# EAGLE board ACE3 (EAGLE 9.4.1)

Size 140.95 x 117.78 mm. Coordinates in mm from the lower left corner, seen from the top.
Outline: 0,0 140.95,0 140.95,117.78 0,117.78 0,0
Copper layers (1*16): Top 0.035mm / dielectric 1.5mm / Bottom 0.035mm
Design rules "default": minimum track width 6mil, minimum drill 0.35mm, track to track 6mil, track to pad 6mil, pad to pad 6mil, via to via 6mil, smd to smd 6mil, copper to edge 40mil, drill to drill 6mil, minimum pad ring 10mil, minimum via ring 8mil, stop-mask expansion 4mil, vias tented up to drill 0mil, thermal gap 10mil

## Footprints (pad centres in the part's own frame; a part is rotated, then mirrored left to right if it is on the bottom)
L02P = drill 1.016 long: 1 1.25,-6.25; 2 -1.25,-6.25
C025-024X044 = drill 0.813 octagon: 1 -1.27,0; 2 1.27,0
E5-5 = drill 0.813 pad 1.905: + -2.54,0 | drill 0.813 pad 1.905 octagon: - 2.54,0
D-2.5 = drill 0.813 octagon: A 1.27,0; C -1.27,0
EDG-CON-JA = smd 1.9 x 8: 0V.1 -25.4,0; +5V -20.32,0; +9V -22.86,0; A0 17.78,0; A2 5.08,0; A7 15.24,0; A8 12.7,0; A9 10.16,0; A10 7.62,0; A11 -15.24,0; A12 -12.7,0; A13 -10.16,0; A14 -7.62,0; A15 -5.08,0; CLK -17.78,0; D1 20.32,0; D3 0,0; D4 -2.54,0; D5 2.54,0; D6 22.86,0; N.C.1 33.02,0; N.C.2 30.48,0; V0.2 -27.94,0; WE 25.4,0 | smd 1.9 x 8 bottom: A1 17.78,0; A3 15.24,0; A4 12.7,0; A5 10.16,0; A6 7.62,0; BUSACK -7.62,0; BUSREQ -2.54,0; D0 20.32,0; D2 22.86,0; D7 25.4,0; GND -27.94,0; HALT -20.32,0; INT -25.4,0; IOREQ -15.24,0; M1 2.54,0; MREQ -17.78,0; N.C.3 33.02,0; N.C.4 30.48,0; NMI -22.86,0; RD -12.7,0; RESET 0,0; RFSH 5.08,0; WAIT -5.08,0; WR -10.16,0
EDG-VID-JA = smd 1.9 x 8: 0V.1 16.51,1.27; 0V.2 11.43,1.27; H0/A0 -13.97,1.27; H1/A1 6.35,1.27; H4/A4 -11.43,1.27; N.C. 8.89,1.27; V2/A7 3.81,1.27; VD0 -3.81,1.27; VD3 -8.89,1.27; VD4 -6.35,1.27; VD5 1.27,1.27; VD7 -1.27,1.27 | smd 1.9 x 8 bottom: +5V 11.43,1.27; H2/A2 -1.27,1.27; H3/A3 -13.97,1.27; V0/A5 -11.43,1.27; V1/A6 -3.81,1.27; V3/A8 3.81,1.27; V4/A9 6.35,1.27; VD1 -6.35,1.27; VD2 -8.89,1.27; VD6 8.89,1.27; VIDEO 16.51,1.27; WE 1.27,1.27
TO220H = drill 1.118 long: 1 -2.54,-10.16; 2 0,-10.16; 3 2.54,-10.16 | hole 3.302: 0,4.826
DIL14 = drill 0.813 long: 1 -7.62,-3.81; 2 -5.08,-3.81; 3 -2.54,-3.81; 4 0,-3.81; 5 2.54,-3.81; 6 5.08,-3.81; 7 7.62,-3.81; 8 7.62,3.81; 9 5.08,3.81; 10 2.54,3.81; 11 0,3.81; 12 -2.54,3.81; 13 -5.08,3.81; 14 -7.62,3.81
Z15/4 = drill 0.6 octagon: 1 -6,-1.8; 2 6,1.8
TO92 = drill 0.813 octagon: 1 1.27,0; 2 0,1.905; 3 -1.27,0
0207/2V = drill 0.813 octagon: 1 -1.27,0; 2 1.27,0
0204/7 = drill 0.813 octagon: 1 -3.81,0; 2 3.81,0
DIL16 = drill 0.813 long: 1 -8.89,-3.81; 2 -6.35,-3.81; 3 -3.81,-3.81; 4 -1.27,-3.81; 5 1.27,-3.81; 6 3.81,-3.81; 7 6.35,-3.81; 8 8.89,-3.81; 9 8.89,3.81; 10 6.35,3.81; 11 3.81,3.81; 12 1.27,3.81; 13 -1.27,3.81; 14 -3.81,3.81; 15 -6.35,3.81; 16 -8.89,3.81
B3F-31XX = drill 1.016 octagon: 1 -2.261,-1.245; 2 2.261,-1.245 | drill 1.499 pad 2.159: 3 -3.505,1.245; 4 3.505,1.245
AL30P = drill 1.194 pad 2.54 octagon: 1 -7.493,0; 2 7.493,0
TO18 = drill 0.813 octagon: 1 -1.27,-1.27; 2 1.27,-1.27; 3 1.27,1.27
HC49U-V = drill 0.813: 1 -2.413,0; 2 2.413,0
DIL40 = drill 0.813 long: 1 -24.13,-7.62; 2 -21.59,-7.62; 3 -19.05,-7.62; 4 -16.51,-7.62; 5 -13.97,-7.62; 6 -11.43,-7.62; 7 -8.89,-7.62; 8 -6.35,-7.62; 9 -3.81,-7.62; 10 -1.27,-7.62; 11 1.27,-7.62; 12 3.81,-7.62; 13 6.35,-7.62; 14 8.89,-7.62; 15 11.43,-7.62; 16 13.97,-7.62; 17 16.51,-7.62; 18 19.05,-7.62; 19 21.59,-7.62; 20 24.13,-7.62; 21 24.13,7.62; 22 21.59,7.62; 23 19.05,7.62; 24 16.51,7.62; 25 13.97,7.62; 26 11.43,7.62; 27 8.89,7.62; 28 6.35,7.62; 29 3.81,7.62; 30 1.27,7.62; 31 -1.27,7.62; 32 -3.81,7.62; 33 -6.35,7.62; 34 -8.89,7.62; 35 -11.43,7.62; 36 -13.97,7.62; 37 -16.51,7.62; 38 -19.05,7.62; 39 -21.59,7.62; 40 -24.13,7.62
DIL28 = drill 0.813 long: 1 -16.51,-7.62; 2 -13.97,-7.62; 3 -11.43,-7.62; 4 -8.89,-7.62; 5 -6.35,-7.62; 6 -3.81,-7.62; 7 -1.27,-7.62; 8 1.27,-7.62; 9 3.81,-7.62; 10 6.35,-7.62; 11 8.89,-7.62; 12 11.43,-7.62; 13 13.97,-7.62; 14 16.51,-7.62; 15 16.51,7.62; 16 13.97,7.62; 17 11.43,7.62; 18 8.89,7.62; 19 6.35,7.62; 20 3.81,7.62; 21 1.27,7.62; 22 -1.27,7.62; 23 -3.81,7.62; 24 -6.35,7.62; 25 -8.89,7.62; 26 -11.43,7.62; 27 -13.97,7.62; 28 -16.51,7.62
DIP254P1524X393-32 = drill 1.118 pad 1.676 square: 1 -15.24,38.1 | drill 1.118 pad 1.676: 2 -15.24,35.56; 3 -15.24,33.02; 4 -15.24,30.48; 5 -15.24,27.94; 6 -15.24,25.4; 7 -15.24,22.86; 8 -15.24,20.32; 9 -15.24,17.78; 10 -15.24,15.24; 11 -15.24,12.7; 12 -15.24,10.16; 13 -15.24,7.62; 14 -15.24,5.08; 15 -15.24,2.54; 16 -15.24,0; 17 0,0; 18 0,2.54; 19 0,5.08; 20 0,7.62; 21 0,10.16; 22 0,12.7; 23 0,15.24; 24 0,17.78; 25 0,20.32; 26 0,22.86; 27 0,25.4; 28 0,27.94; 29 0,30.48; 30 0,33.02; 31 0,35.56; 32 0,38.1
DIL24-6 = drill 0.813 long: 1 -13.97,-7.62; 2 -11.43,-7.62; 3 -8.89,-7.62; 4 -6.35,-7.62; 5 -3.81,-7.62; 6 -1.27,-7.62; 7 1.27,-7.62; 8 3.81,-7.62; 9 6.35,-7.62; 10 8.89,-7.62; 11 11.43,-7.62; 12 13.97,-7.62; 13 13.97,7.62; 14 11.43,7.62; 15 8.89,7.62; 16 6.35,7.62; 17 3.81,7.62; 18 1.27,7.62; 19 -1.27,7.62; 20 -3.81,7.62; 21 -6.35,7.62; 22 -8.89,7.62; 23 -11.43,7.62; 24 -13.97,7.62

## Placement (x,y rotation side)
AUDIO-IN  [L02P]  135.89,73.66 0 top
AUDIO-OUT  [L02P]  123.19,120.65 0 top
C1  47N  [C025-024X044]  34.29,80.01 0 top
C2  47N  [C025-024X044]  -64.77,152.4 0 top  (outside the outline)
C3  47N  [C025-024X044]  -69.85,152.4 0 top  (outside the outline)
C4  42p  [C025-024X044]  -74.93,152.4 0 top  (outside the outline)
C5  47N  [C025-024X044]  -80.01,152.4 0 top  (outside the outline)
C6  47N  [C025-024X044]  -85.09,152.4 0 top  (outside the outline)
C7  1U  [E5-5]  64.77,93.98 0 top
C8  2N2  [C025-024X044]  -90.17,152.4 0 top  (outside the outline)
C9  100u  [E5-5]  -135.89,158.75 0 top  (outside the outline)
C10  100N  [C025-024X044]  -140.97,140.97 0 top  (outside the outline)
C11  100u  [E5-5]  -147.32,158.75 0 top  (outside the outline)
C12  100u  [E5-5]  73.66,93.98 0 top
C13  100N  [C025-024X044]  -147.32,140.97 0 top  (outside the outline)
C14  100N  [C025-024X044]  -153.67,140.97 0 top  (outside the outline)
C15  100N  [C025-024X044]  77.47,80.01 0 top
C16  100N  [C025-024X044]  71.12,80.01 0 top
C17  100N  [C025-024X044]  64.77,80.01 0 top
C18  100N  [C025-024X044]  58.42,80.01 0 top
C19  100N  [C025-024X044]  52.07,80.01 0 top
C20  100N  [C025-024X044]  45.72,80.01 0 top
C21  100N  [C025-024X044]  39.37,80.01 0 top
COMPOSITE-OUT  [L02P]  135.89,120.65 0 top
D1  1N4148DO35  [D-2.5]  -156.21,-67.31 0 top  (outside the outline)
D2  1N4148DO35  [D-2.5]  -156.21,-73.66 0 top  (outside the outline)
D3  1N4148DO35  [D-2.5]  -156.21,-86.36 0 top  (outside the outline)
D4  1N4148DO35  [D-2.5]  -156.21,-92.71 0 top  (outside the outline)
D5  1N4148DO35  [D-2.5]  -156.21,-99.06 0 top  (outside the outline)
D6  1N4148DO35  [D-2.5]  -156.21,-105.41 0 top  (outside the outline)
D7  1N4148DO35  [D-2.5]  -156.21,-111.76 0 top  (outside the outline)
D8  1N4148DO35  [D-2.5]  -156.21,-118.11 0 top  (outside the outline)
D9  1N4148DO35  [D-2.5]  -156.21,-124.46 0 top  (outside the outline)
D10  1N4148DO35  [D-2.5]  -156.21,-130.81 0 top  (outside the outline)
D11  1N4148DO35  [D-2.5]  -156.21,-60.96 0 top  (outside the outline)
E1  EDG-CON-JA  [EDG-CON-JA]  45.72,71.12 0 top
E2  EDG-VID-JA  [EDG-VID-JA]  -96.52,140.97 0 top  (outside the outline)
IC1  7805T  [TO220H]  -68.58,12.7 0 top  (outside the outline)
IC2  74HCT04N  [DIL14]  67.31,10.16 0 top
IC4  74LS32N  [DIL14]  15.24,6.35 0 top
L1  [Z15/4]  53.34,93.98 0 top
POWER-IN-9V-DC  [L02P]  -3.81,6.35 90 top
Q1  2N3904  [TO92]  -67.31,172.72 0 top  (outside the outline)
Q3  BC237  [TO92]  -92.71,172.72 0 top  (outside the outline)
R1  47k  [0207/2V]  64.77,100.33 0 top
R2  12k  [0207/2V]  58.42,100.33 0 top
R3  1K5  [0207/2V]  -154.94,166.37 0 top  (outside the outline)
R4  1K5  [0207/2V]  77.47,100.33 0 top
R5  12k  [0207/2V]  52.07,100.33 0 top
R6  1K  [0207/2V]  39.37,100.33 0 top
R7  1k0  [0204/7]  -100.33,171.45 0 top  (outside the outline)
R8  270R  [0207/2V]  41.91,93.98 0 top
R9  47k  [0207/2V]  45.72,100.33 0 top
R10  10k  [0207/2V]  -66.04,166.37 0 top  (outside the outline)
R11  1k  [0207/2V]  71.12,100.33 0 top
R12  1k  [0207/2V]  -72.39,166.37 0 top  (outside the outline)
R13  1k  [0207/2V]  -78.74,166.37 0 top  (outside the outline)
R14  1k  [0207/2V]  -85.09,166.37 0 top  (outside the outline)
R15  1k  [0207/2V]  -91.44,166.37 0 top  (outside the outline)
R16  1k  [0207/2V]  -97.79,166.37 0 top  (outside the outline)
R17  1k  [0207/2V]  -104.14,166.37 0 top  (outside the outline)
R18  1k  [0207/2V]  -110.49,166.37 0 top  (outside the outline)
R19  1k  [0207/2V]  -116.84,166.37 0 top  (outside the outline)
R20  1k  [0207/2V]  -123.19,166.37 0 top  (outside the outline)
R21  1k  [0207/2V]  -129.54,166.37 0 top  (outside the outline)
R22  1k  [0207/2V]  -135.89,166.37 0 top  (outside the outline)
R23  1k  [0207/2V]  -142.24,166.37 0 top  (outside the outline)
R24  10k  [0207/2V]  -148.59,166.37 0 top  (outside the outline)
R25  220k  [0207/2V]  34.29,93.98 0 top
R26  330R  [0204/7]  -110.49,171.45 0 top  (outside the outline)
RN1  1K0  [DIL16]  109.22,22.86 0 top
RN2  1K0  [DIL16]  107.95,8.89 0 top
S1  1  [B3F-31XX]  -128.27,57.15 0 top  (outside the outline)
S2  2  [B3F-31XX]  -138.43,57.15 0 top  (outside the outline)
S3  3  [B3F-31XX]  -148.59,57.15 0 top  (outside the outline)
S4  4  [B3F-31XX]  -17.78,76.2 0 top  (outside the outline)
S5  5  [B3F-31XX]  -27.94,76.2 0 top  (outside the outline)
S6  6  [B3F-31XX]  -38.1,76.2 0 top  (outside the outline)
S7  7  [B3F-31XX]  -48.26,76.2 0 top  (outside the outline)
S8  8  [B3F-31XX]  -58.42,76.2 0 top  (outside the outline)
S9  9  [B3F-31XX]  -68.58,76.2 0 top  (outside the outline)
S10  0  [B3F-31XX]  -78.74,76.2 0 top  (outside the outline)
S11  Q  [B3F-31XX]  -88.9,76.2 0 top  (outside the outline)
S12  W  [B3F-31XX]  -99.06,76.2 0 top  (outside the outline)
S13  E  [B3F-31XX]  134.62,88.9 0 top
S14  R  [B3F-31XX]  124.46,88.9 0 top
S15  T  [B3F-31XX]  114.3,88.9 0 top
S16  Y  [B3F-31XX]  104.14,88.9 0 top
S17  U  [B3F-31XX]  93.98,88.9 0 top
S18  I  [B3F-31XX]  -17.78,87.63 0 top  (outside the outline)
S19  O  [B3F-31XX]  -27.94,87.63 0 top  (outside the outline)
S20  P  [B3F-31XX]  -38.1,87.63 0 top  (outside the outline)
S21  A  [B3F-31XX]  -48.26,87.63 0 top  (outside the outline)
S22  S  [B3F-31XX]  -58.42,87.63 0 top  (outside the outline)
S23  D  [B3F-31XX]  -68.58,87.63 0 top  (outside the outline)
S24  F  [B3F-31XX]  -78.74,87.63 0 top  (outside the outline)
S25  G  [B3F-31XX]  -88.9,87.63 0 top  (outside the outline)
S26  H  [B3F-31XX]  -99.06,87.63 0 top  (outside the outline)
S27  I  [B3F-31XX]  134.62,100.33 0 top
S28  J  [B3F-31XX]  124.46,100.33 0 top
S29  K  [B3F-31XX]  114.3,100.33 0 top
S30  L  [B3F-31XX]  104.14,100.33 0 top
S31  SHIFT  [B3F-31XX]  93.98,100.33 0 top
S32  CTRL  [B3F-31XX]  -17.78,99.06 0 top  (outside the outline)
S33  Z  [B3F-31XX]  -27.94,99.06 0 top  (outside the outline)
S34  X  [B3F-31XX]  -38.1,99.06 0 top  (outside the outline)
S35  C  [B3F-31XX]  -48.26,99.06 0 top  (outside the outline)
S36  V  [B3F-31XX]  -58.42,99.06 0 top  (outside the outline)
S37  B  [B3F-31XX]  -68.58,99.06 0 top  (outside the outline)
S38  N  [B3F-31XX]  -78.74,99.06 0 top  (outside the outline)
S39  M  [B3F-31XX]  -88.9,99.06 0 top  (outside the outline)
S40  SPACE  [B3F-31XX]  -99.06,99.06 0 top  (outside the outline)
SP1  AL30P  [AL30P]  43.18,27.94 0 top
T1  2N2369  [TO18]  7.62,15.24 0 top
X1  6.556MHz  [HC49U-V]  -118.11,142.24 0 top  (outside the outline)
Z0  [DIL40]  -102.87,10.16 0 top  (outside the outline)
Z1-2  [DIL28]  -137.16,-48.26 0 top  (outside the outline)
Z3-4  AS6C1008-55PCN  [DIP254P1524X393-32]  -160.02,-125.73 0 top  (outside the outline)
Z5-6  [DIL24-6]  -27.94,59.69 0 top  (outside the outline)
Z7-8  [DIL24-6]  -62.23,59.69 0 top  (outside the outline)
Z9  74LS393N  [DIL14]  -22.86,120.65 0 top  (outside the outline)
Z10  74LS393N  [DIL14]  -43.18,120.65 0 top  (outside the outline)
Z11  74LS393N  [DIL14]  -63.5,120.65 0 top  (outside the outline)
Z12  74LS166N  [DIL16]  -115.57,109.22 0 top  (outside the outline)
Z13  74LS138N  [DIL16]  -138.43,109.22 0 top  (outside the outline)
Z14  74HCT367N  [DIL16]  129.54,74.93 0 top
Z15  74HCT367N  [DIL16]  129.54,63.5 0 top
Z16  74HCT367N  [DIL16]  129.54,52.07 0 top
Z17  74HCT367N  [DIL16]  129.54,40.64 0 top
Z18  74HCT367N  [DIL16]  129.54,29.21 0 top
Z19  74LS00N  [DIL14]  -83.82,120.65 0 top  (outside the outline)
Z20  74LS08N  [DIL14]  -104.14,120.65 0 top  (outside the outline)
Z21  74LS11N  [DIL14]  -124.46,120.65 0 top  (outside the outline)
Z22  74LS11N  [DIL14]  -144.78,120.65 0 top  (outside the outline)
Z23  74LS86N  [DIL14]  -22.86,132.08 0 top  (outside the outline)
Z24  74LS02N  [DIL14]  -43.18,132.08 0 top  (outside the outline)
Z25  74LS02N  [DIL14]  -63.5,132.08 0 top  (outside the outline)
Z26  74LS32N  [DIL14]  -83.82,132.08 0 top  (outside the outline)
Z27  74LS74N  [DIL14]  -104.14,132.08 0 top  (outside the outline)
Z50  74LS21N  [DIL14]  -124.46,132.08 0 top  (outside the outline)

## Library data of the parts
AUDIO-IN AUDIO-OUT COMPOSITE-OUT POWER-IN-9V-DC = con-amp-mt; OC_FARNELL: unknown; OC_NEWARK: unknown
C1-C21 = rcl; SPICEPREFIX: C
D1-D11 = diode
E1 E2 = Jupiter-ace-2015.3
IC1 = linear
IC2 IC4 Z9-Z27 Z50 = 74xx-eu
L1 = inductor-neosid; OC_FARNELL: unknown; OC_NEWARK: unknown
Q1 Q3 T1 = transistor
R1-R26 = rcl; SPICEPREFIX: R
RN1 RN2 = resistor-dil; OC_FARNELL: unknown; OC_NEWARK: unknown
S1-S40 = switch-omron; MPN: B3F-3100; OC_FARNELL: 959704; OC_NEWARK: 36M3582
SP1 = buzzer; OC_FARNELL: unknown; OC_NEWARK: unknown
X1 = crystal; OC_FARNELL: 1666969; OC_NEWARK: unknown
Z0 = zilog
Z1-2 = memory
Z3-4 = AS6C1008-55PCN; DESCRIPTION: CMOS SRAM; HEIGHT: mm; MANUFACTURER_NAME: Alliance Memory; MANUFACTURER_PART_NUMBER: AS6C1008-55PCN; RS_PART_NUMBER: 1700891; RS_PRICE-STOCK: http://uk.rs-online.com/web/p/products/1700891
Z5-6 Z7-8 = memory-idt; OC_FARNELL: unknown; OC_NEWARK: unknown

## Nets
2764: Z1-2.20 Z1-2.22 Z13.15
+9VDC: C11.+ E1.+9V IC1.1 L1.2
/BUSAK: E1.BUSACK Z0.23
/BUSRQ: E1.BUSREQ R24.2 Z0.25
/CLK: E1.CLK Z9.1 Z12.7 Z20.10 Z23.8
/HALT: E1.HALT Z0.18
/INT: E1.INT IC2.8 Z0.16
/IOREQ: E1.IOREQ Z0.20 Z26.4
/M1: E1.M1 Z0.27
/MREQ: E1.MREQ Z0.19 Z13.4 Z13.5
/RD: E1.RD Z0.21 Z3-4.24 Z24.6
/REFSH: E1.RFSH Z0.28
/RESET: C7.+ E1.RESET R25.2 Z0.26
/VHOLD: Z16.15 Z19.8 Z26.1
/WAIT: C8.1 E1.WAIT Z0.24 Z26.3
/WE: E1.WE E2.WE
/WR: E1.WR Z0.22 Z3-4.29 Z24.3 Z26.12
ADDRESS0: E1.A0 Z0.30 Z1-2.10 Z3-4.12 Z15.2 Z17.10 Z26.5
ADDRESS1: E1.A1 Z0.31 Z1-2.9 Z3-4.11 Z15.4 Z17.6
ADDRESS2: E1.A2 Z0.32 Z1-2.8 Z3-4.10 Z15.6 Z17.4
ADDRESS3: E1.A3 Z0.33 Z1-2.7 Z3-4.9 Z15.10 Z17.2
ADDRESS4: E1.A4 Z0.34 Z1-2.6 Z3-4.8 Z15.12 Z18.14
ADDRESS5: E1.A5 Z0.35 Z1-2.5 Z3-4.7 Z15.14 Z18.12
ADDRESS6: E1.A6 Z0.36 Z1-2.4 Z3-4.6 Z16.2 Z18.10
ADDRESS7: E1.A7 Z0.37 Z1-2.3 Z3-4.5 Z16.4 Z18.6
ADDRESS8: D10.C E1.A8 Z0.38 Z1-2.25 Z3-4.27 Z16.6 Z18.4
ADDRESS9: D9.C E1.A9 Z0.39 Z1-2.24 Z3-4.26 Z16.10 Z18.2
ADDRESS10: D8.C E1.A10 Z0.40 Z1-2.21 Z3-4.23 Z19.9
ADDRESS11: D7.C E1.A11 Z0.1 Z1-2.23 Z3-4.25 Z25.9
ADDRESS12: D6.C E1.A12 IC2.1 IC4.1 Z0.2 Z1-2.2 Z3-4.4
ADDRESS13: D5.C E1.A13 Z0.3 Z1-2.26 Z3-4.28 Z13.1
ADDRESS14: D4.C E1.A14 Z0.4 Z1-2.27 Z3-4.3 Z13.2
ADDRESS15: D3.C E1.A15 Z0.5 Z3-4.31 Z13.3
CNT0: C4.1 R7.1 Z9.3 Z21.5
CNT1: Z9.4 Z21.4
CNT2: Z9.5 Z21.3
CNT3: R11.1 Z9.6 Z9.13
CNT4: R12.1 Z9.11 Z10.1
CNT5: R13.1 Z10.3 Z21.9 Z25.11
CNT6: R14.1 Z10.4 Z22.1
CNT7: R15.1 Z10.5 Z21.10 Z25.12
CNT8: Z10.6 Z10.13 Z21.11 Z22.13 Z25.3
CNT9: R21.1 Z10.11
CNT10: R22.1 Z10.10
CNT11: R23.1 Z10.9 Z11.1
CNT12: R16.1 Z11.3 Z21.1
CNT13: R17.1 Z11.4 Z21.2
CNT14: R18.1 Z11.5 Z21.13
CNT15: R19.1 Z11.6 Z11.13 Z19.2 Z22.3
CNT16: R20.1 Z11.11 Z19.1 Z22.4
CNT17: Z11.10 Z20.2 Z25.2
CSB4KV: IC2.11 IC2.12 Z5-6.18
CST4KV: Z7-8.18 Z25.10 Z26.10
DATA0: E1.D0 RN1.1 RN2.1 Z0.14 Z1-2.11 Z3-4.13 Z14.3 Z27.2
DATA1: E1.D1 RN1.2 RN2.2 Z0.15 Z1-2.12 Z3-4.14 Z14.5
DATA2: E1.D2 RN1.3 RN2.3 Z0.12 Z1-2.13 Z3-4.15 Z14.7
DATA3: E1.D3 RN1.4 RN2.4 Z0.8 Z1-2.15 Z3-4.17 Z14.9
DATA4: E1.D4 RN1.5 RN2.5 Z0.7 Z1-2.16 Z3-4.18 Z14.11
DATA5: E1.D5 RN1.6 RN2.6 Z0.9 Z1-2.17 Z3-4.19 Z14.13
DATA6: E1.D6 RN1.7 RN2.7 Z0.10 Z1-2.18 Z3-4.20
DATA7: E1.D7 RN1.8 RN2.8 Z0.13 Z1-2.19 Z3-4.21
EAR: Z14.14 Z17.13
GND: AUDIO-IN.2 AUDIO-OUT.2 C1.1 C7.- C8.2 C9.- C10.1 C11.- C12.- C13.1 C14.1 C15.1 C16.1 C17.1 C18.1 C19.1 C20.1 C21.1 COMPOSITE-OUT.2 E1.0V.1 E1.GND E1.V0.2 E2.0V.1 E2.0V.2 IC1.2 IC2.7 IC4.7 POWER-IN-9V-DC.2 Q1.3 Q3.1 R5.1 R6.1 T1.1 Z0.29 Z1-2.14 Z3-4.2 Z5-6.12 Z5-6.19 Z7-8.12 Z7-8.19 Z9.2 Z9.7 Z9.12 Z10.7 Z10.12 Z11.7 Z12.1 Z12.6 Z12.8 Z13.8 Z14.8 Z15.8 Z16.8 Z17.8 Z17.15 Z18.8 Z19.7 Z20.7 Z21.7 Z22.7 Z23.7 Z23.10 Z24.7 Z25.7 Z26.7 Z27.7 Z50.7
N$1: Z13.12 Z50.4
N$2: IC4.3 R26.1 Z26.2
N$3: Z13.11 Z50.5
N$4: C3.2 R5.2 Z17.14
N$5: R11.2 Z5-6.8 Z15.3
N$6: IC4.2 IC4.5 Z13.14
N$7: IC4.6 Z50.1
N$8: IC2.3 Z5-6.21 Z7-8.21 Z26.11
N$9: IC2.4 Z5-6.20 Z7-8.20
N$10: Z19.3 Z20.4
N$11: Z20.5 Z25.1
N$12: AUDIO-IN.1 C3.1 R6.2
N$13: R12.2 Z5-6.7 Z15.5
N$14: Z20.11 Z27.12
N$15: Z20.8 Z27.11
N$16: R13.2 Z5-6.6 Z15.7
N$17: Z23.12 Z27.9
N$18: Z12.13 Z23.13
N$19: R3.2 Z23.11
N$20: RN1.12 Z5-6.14 Z7-8.1 Z18.7
N$21: IC2.10 Z17.1 Z18.1 Z18.15
N$22: Z12.15 Z19.6
N$23: Z13.10 Z50.10
N$24: R8.2 T1.3 Z0.6
N$25: Z13.9 Z50.12
N$26: C4.2 R7.2 T1.2
N$27: RN2.10 Z7-8.16 Z12.12
N$28: Z13.7 Z50.13
N$29: IC2.6 Z14.15
N$30: IC2.2 IC4.4
N$31: Z24.2 Z24.5 Z26.6
N$32: R14.2 Z5-6.5 Z15.9
N$33: C5.2 Q1.1 R1.1 R9.2 Z23.9
N$34: Z24.10 Z24.11
N$35: Z24.1 Z24.8 Z27.3
N$36: C5.1 X1.1
N$37: R15.2 Z5-6.4 Z15.11
N$38: R2.2 Z24.9 Z24.13
N$39: IC2.5 Z24.4 Z24.12
N$40: Q3.2 R2.1
N$41: R10.2 Z27.5
N$42: C6.1 R10.1
N$43: AUDIO-OUT.1 C2.2 C6.2
N$44: C2.1 D2.A Q3.3 SP1.2
N$45: R16.2 Z5-6.3 Z15.13
N$46: R17.2 Z5-6.2 Z16.3
N$47: C1.2 Q1.2 R1.2 X1.2
N$48: R18.2 Z5-6.1 Z16.5
N$49: Z20.1 Z21.12 Z22.5
N$50: IC2.9 Z22.6 Z25.6
N$51: D1.C Z25.4
N$52: Z22.2 Z25.13
N$53: D7.A S1.1 S2.1 S3.1 S4.1 S5.1
N$54: Z10.2 Z21.8
N$55: Z11.2 Z11.12 Z20.3
N$56: S1.2 S10.2 S11.2 S20.2 S21.2 S30.2 S31.2 S40.2 Z14.2
N$57: D8.A S11.1 S12.1 S13.1 S14.1 S15.1
N$58: D9.A S21.1 S22.1 S23.1 S24.1 S25.1
N$59: Z22.12 Z25.5
N$60: D10.A S31.1 S32.1 S33.1 S34.1 S35.1
N$61: S3.2 S8.2 S13.2 S18.2 S23.2 S28.2 S33.2 S38.2 Z14.6
N$62: S4.2 S7.2 S14.2 S17.2 S24.2 S27.2 S34.2 S37.2 Z14.10
N$63: S2.2 S9.2 S12.2 S19.2 S22.2 S29.2 S32.2 S39.2 Z14.4
N$64: S5.2 S6.2 S15.2 S16.2 S25.2 S26.2 S35.2 S36.2 Z14.12
N$65: C9.+ C10.2 L1.1 POWER-IN-9V-DC.1
N$66: Z13.13 Z50.2
N$67: R19.2 Z5-6.23 Z16.7
N$68: R20.2 Z5-6.22 Z16.9
N$69: D11.A Z16.13
N$70: RN1.9 Z5-6.17 Z20.13
N$71: R21.2 Z7-8.8 Z17.9
N$72: Z50.6 Z50.9
N$73: R22.2 Z7-8.7 Z17.7
N$74: R23.2 Z7-8.6 Z17.5
N$75: RN1.16 Z5-6.9 Z7-8.5 Z17.3
N$76: RN1.15 Z5-6.10 Z7-8.4 Z18.13
N$77: D6.A S6.1 S7.1 S8.1 S9.1 S10.1
N$78: D5.A S16.1 S17.1 S18.1 S19.1 S20.1
N$79: D4.A S26.1 S27.1 S28.1 S29.1 S30.1
N$80: D3.A S36.1 S37.1 S38.1 S39.1 S40.1
N$81: RN1.14 Z5-6.11 Z7-8.3 Z18.11
N$82: RN1.13 Z5-6.13 Z7-8.2 Z18.9
N$83: IC2.13 Z26.8
N$84: RN1.11 Z5-6.15 Z7-8.23 Z18.5
N$85: RN1.10 Z5-6.16 Z7-8.22 Z18.3
N$86: D11.C R26.2 Z15.1 Z15.15 Z16.1 Z16.14 Z25.8 Z26.9 Z26.13
N$87: Z3-4.22 Z19.12 Z19.13 Z50.8
N$88: Z3-4.30 Z19.11
N$90: RN2.9 Z7-8.17 Z12.14
N$91: RN2.16 Z7-8.9 Z12.2
N$92: RN2.15 Z7-8.10 Z12.3
N$93: RN2.14 Z7-8.11 Z12.4
N$94: RN2.13 Z7-8.13 Z12.5
N$95: RN2.12 Z7-8.14 Z12.10
N$96: RN2.11 Z7-8.15 Z12.11
S7BALPHA: Z19.5 Z20.6 Z20.12
VCC: C12.+ C13.2 C14.2 C15.2 C16.2 C17.2 C18.2 C19.2 C20.2 C21.2 D2.C E1.+5V E1.NMI E2.+5V IC1.3 IC2.14 IC4.14 R4.2 R8.1 R9.1 R24.1 R25.1 SP1.1 Z0.11 Z0.17 Z1-2.28 Z5-6.24 Z7-8.24 Z9.14 Z10.14 Z11.14 Z12.9 Z12.16 Z13.6 Z13.16 Z14.16 Z15.16 Z16.12 Z16.16 Z17.12 Z17.16 Z18.16 Z19.14 Z20.14 Z21.14 Z22.14 Z23.14 Z24.14 Z25.14 Z26.14 Z27.1 Z27.4 Z27.10 Z27.13 Z27.14 Z50.14
VIDEN: Z19.4 Z19.10 Z20.9 Z21.6
VIDEO: COMPOSITE-OUT.1 D1.A E2.VIDEO R3.1 R4.1

## Tracks (layer width: path | path; a pad name or v marks a point on that pad's centre or on a via)
2764  (2 unrouted)
+9VDC  (3 unrouted)
/BUSAK  (1 unrouted)
/BUSRQ  (2 unrouted)
/CLK  (4 unrouted)
/HALT  (1 unrouted)
/INT  (2 unrouted)
/IOREQ  (2 unrouted)
/M1  (1 unrouted)
/MREQ  (3 unrouted)
/RD  (3 unrouted)
/REFSH  (1 unrouted)
/RESET  (3 unrouted)
/VHOLD  (2 unrouted)
/WAIT  (3 unrouted)
/WE  (1 unrouted)
/WR  (4 unrouted)
ADDRESS0  (6 unrouted)
ADDRESS1  (5 unrouted)
ADDRESS2  (5 unrouted)
ADDRESS3  (5 unrouted)
ADDRESS4  (5 unrouted)
ADDRESS5  (5 unrouted)
ADDRESS6  (5 unrouted)
ADDRESS7  (5 unrouted)
ADDRESS8  (6 unrouted)
ADDRESS9  (6 unrouted)
ADDRESS10  (5 unrouted)
ADDRESS11  (5 unrouted)
ADDRESS12  (6 unrouted)
ADDRESS13  (5 unrouted)
ADDRESS14  (5 unrouted)
ADDRESS15  (4 unrouted)
CNT0  (3 unrouted)
CNT1  (1 unrouted)
CNT2  (1 unrouted)
CNT3  (2 unrouted)
CNT4  (2 unrouted)
CNT5  (3 unrouted)
CNT6  (2 unrouted)
CNT7  (3 unrouted)
CNT8  (4 unrouted)
CNT9  (1 unrouted)
CNT10  (1 unrouted)
CNT11  (2 unrouted)
CNT12  (2 unrouted)
CNT13  (2 unrouted)
CNT14  (2 unrouted)
CNT15  (4 unrouted)
CNT16  (3 unrouted)
CNT17  (2 unrouted)
CSB4KV  (2 unrouted)
CST4KV  (2 unrouted)
DATA0  (7 unrouted)
DATA1  (6 unrouted)
DATA2  (6 unrouted)
DATA3  (6 unrouted)
DATA4  (6 unrouted)
DATA5  (6 unrouted)
DATA6  (5 unrouted)
DATA7  (5 unrouted)
EAR  (1 unrouted)
GND  (66 unrouted)
N$1  (1 unrouted)
N$2  (2 unrouted)
N$3  (1 unrouted)
N$4  (2 unrouted)
N$5  (2 unrouted)
N$6  (2 unrouted)
N$7  (1 unrouted)
N$8  (3 unrouted)
N$9  (2 unrouted)
N$10  (1 unrouted)
N$11  (1 unrouted)
N$12  (2 unrouted)
N$13  (2 unrouted)
N$14  (1 unrouted)
N$15  (1 unrouted)
N$16  (2 unrouted)
N$17  (1 unrouted)
N$18  (1 unrouted)
N$19  (1 unrouted)
N$20  (3 unrouted)
N$21  (3 unrouted)
N$22  (1 unrouted)
N$23  (1 unrouted)
N$24  (2 unrouted)
N$25  (1 unrouted)
N$26  (2 unrouted)
N$27  (2 unrouted)
N$28  (1 unrouted)
N$29  (1 unrouted)
N$30  (1 unrouted)
N$31  (2 unrouted)
N$32  (2 unrouted)
N$33  (4 unrouted)
N$34  (1 unrouted)
N$35  (2 unrouted)
N$36  (1 unrouted)
N$37  (2 unrouted)
N$38  (2 unrouted)
N$39  (2 unrouted)
N$40  (1 unrouted)
N$41  (1 unrouted)
N$42  (1 unrouted)
N$43  (2 unrouted)
N$44  (3 unrouted)
N$45  (2 unrouted)
N$46  (2 unrouted)
N$47  (3 unrouted)
N$48  (2 unrouted)
N$49  (2 unrouted)
N$50  (2 unrouted)
N$51  (1 unrouted)
N$52  (1 unrouted)
N$53  (5 unrouted)
N$54  (1 unrouted)
N$55  (2 unrouted)
N$56  (8 unrouted)
N$57  (5 unrouted)
N$58  (5 unrouted)
N$59  (1 unrouted)
N$60  (5 unrouted)
N$61  (8 unrouted)
N$62  (8 unrouted)
N$63  (8 unrouted)
N$64  (8 unrouted)
N$65  (3 unrouted)
N$66  (1 unrouted)
N$67  (2 unrouted)
N$68  (2 unrouted)
N$69  (1 unrouted)
N$70  (2 unrouted)
N$71  (2 unrouted)
N$72  (1 unrouted)
N$73  (2 unrouted)
N$74  (2 unrouted)
N$75  (3 unrouted)
N$76  (3 unrouted)
N$77  (5 unrouted)
N$78  (5 unrouted)
N$79  (5 unrouted)
N$80  (5 unrouted)
N$81  (3 unrouted)
N$82  (3 unrouted)
N$83  (1 unrouted)
N$84  (3 unrouted)
N$85  (3 unrouted)
N$86  (8 unrouted)
N$87  (3 unrouted)
N$88  (1 unrouted)
N$90  (2 unrouted)
N$91  (2 unrouted)
N$92  (2 unrouted)
N$93  (2 unrouted)
N$94  (2 unrouted)
N$95  (2 unrouted)
N$96  (2 unrouted)
S7BALPHA  (2 unrouted)
VCC  (55 unrouted)
VIDEN  (3 unrouted)
VIDEO  (4 unrouted)